# Altium PCB 4ch GRT reader.PcbDoc
Units mil, origin at the board's own origin, x right, y up, seen from the top; angles counter-clockwise.
Board outline 2650 x 4500 mil, 2 copper layers (Top Layer, Bottom Layer); 72 components, 98 nets, 358 pads, 0 vias.
Unrouted connection lines stored in the file: 233.
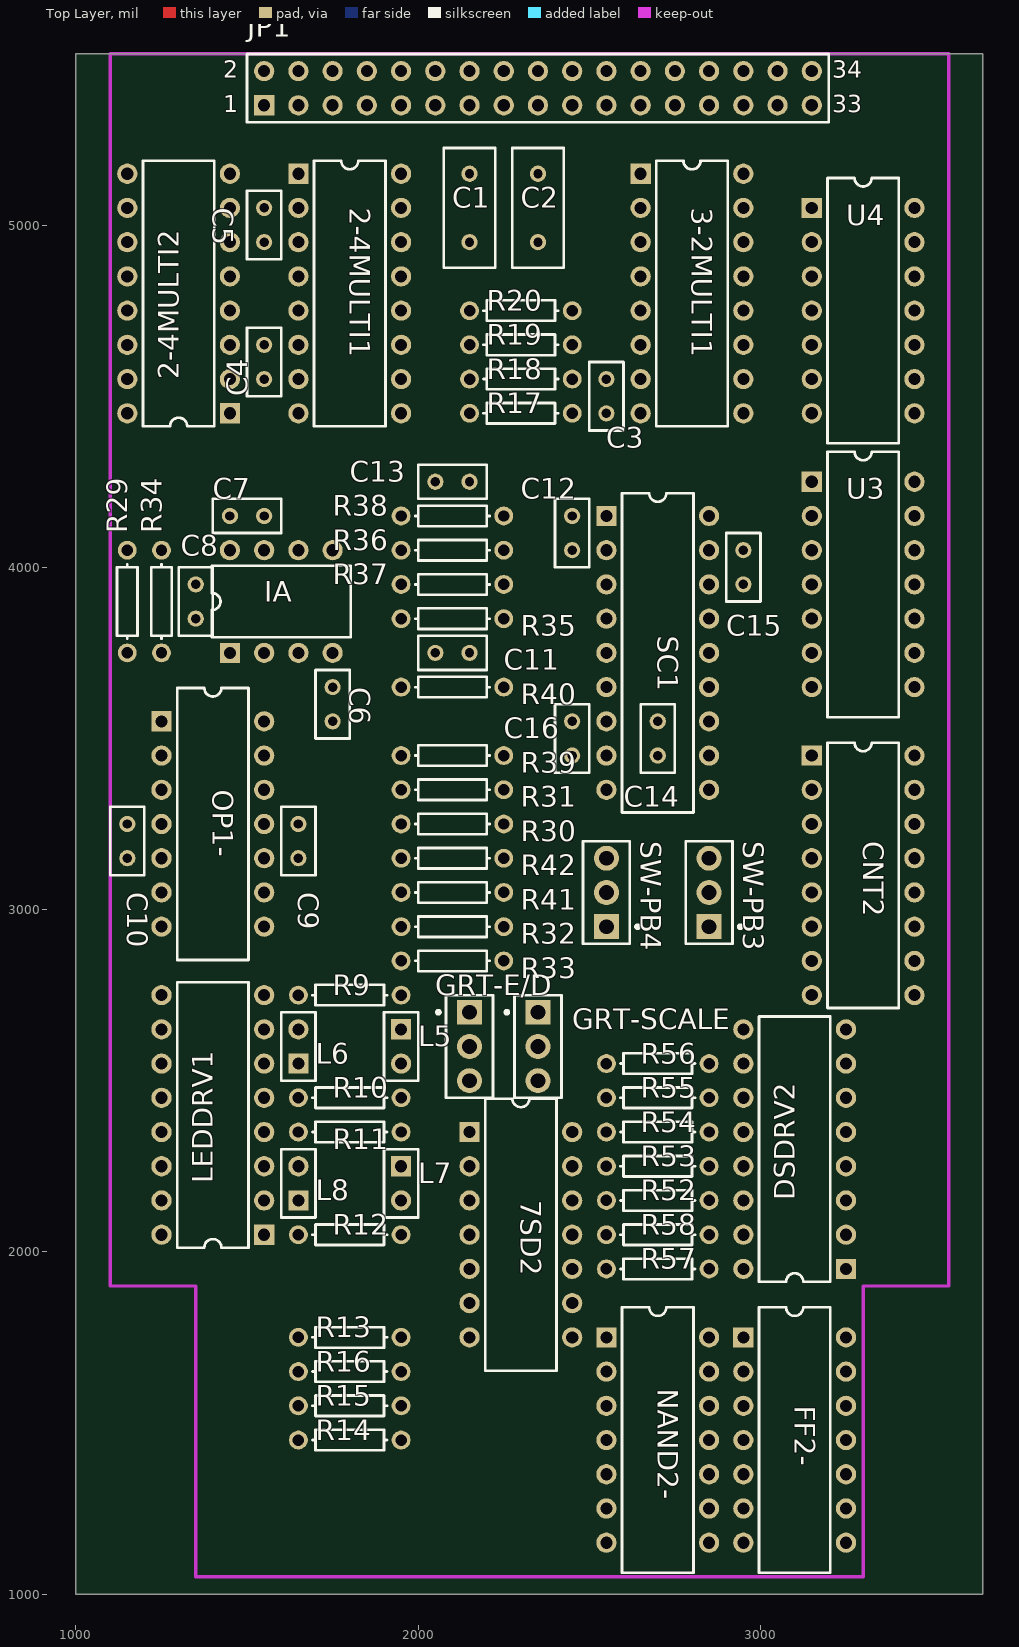
[diagram p0: Top Layer view]
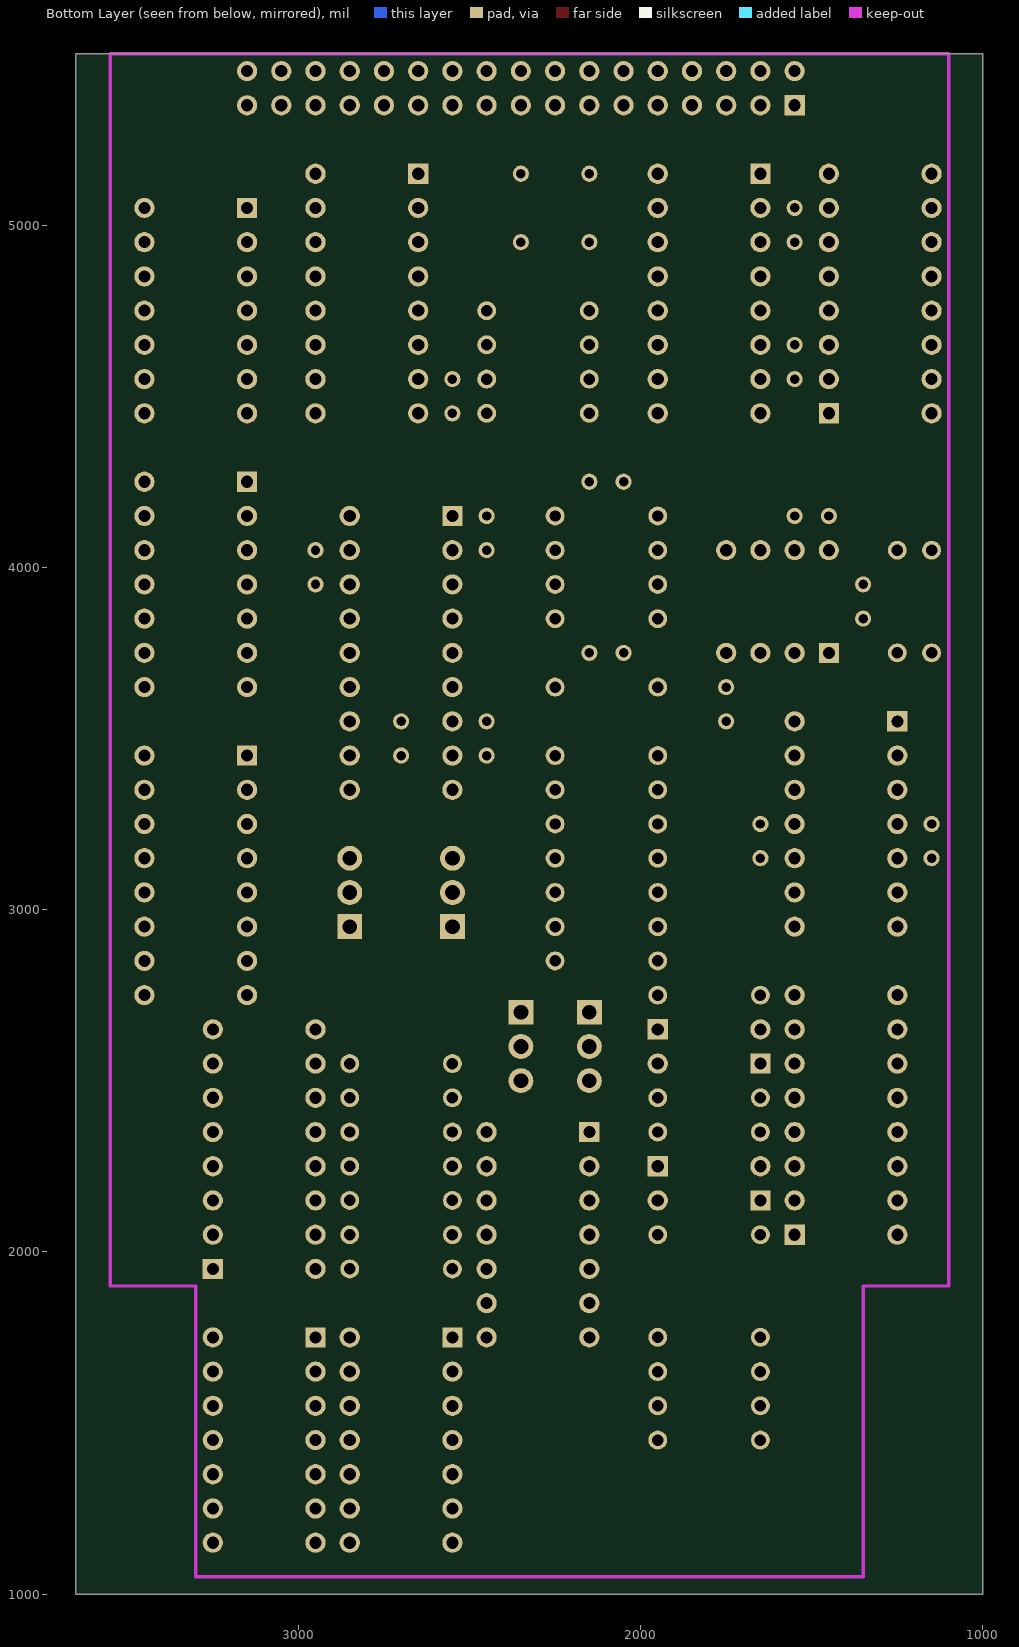
[diagram p1: Bottom Layer view, seen from below]

## Layer stack, top to bottom
Top Layer: signal copper 1.4
Dielectric: dielectric 12.6, FR-4, Dk 4.8
Bottom Layer: signal copper 1.4

## Board outline
1000,1000 1000,5500 3650,5500 3650,1000

## Design rules (kind name [scope] priority, off if disabled: settings)
Clearance [All] p1: gap=10
ComponentClearance [All] p1: gap=10 collisioncheckmode=0
PolygonConnect [All] p1: connectstyle=Relief reliefconductorwidth=10 reliefentries=4 polygonreliefangle="90 Angle"
RoutingLayers [All] p1: top layer=Horizontal bottom layer=Vertical
RoutingVias [All] p1: holewidth=28 width=50 viastyle="Through Hole" minholewidth=28 minwidth=50 maxholewidth=28 maxwidth=50
SolderMaskExpansion [All] p1: expansion=4
TestPointUsage [All] p1: valid=0 allowmultiple=FALSE
Testpoint [All] p1: side=15 testpointundercomponent=TRUE minsize=40 maxsize=100 preferedsize=60 minholesize=0 maxholesize=40 preferedholesize=32 testpointgrid=1 style=1023 order=1234567890
Width [All] p1: maxlimit=10 minlimit=10 preferedwidth=10
16 further rules are at their usual default settings.

## Components (designator, comment, footprint, x,y, rotation, side; value= is the part's Value field where it differs from the comment)
2-4MULTI1 "MC74HC4052N" DIP-16/X1.5 1800,4800 r270 top
2-4MULTI2 "MC74HC4052N" DIP-16/X1.5 1300,4800 r90 top
3-2MULTI1 "MC74HC4053N" DIP-16/X1.5 2800,4800 r270 top
7SD2 "LED-5082-7650" DIP-14 2300,2050 r270 top
C1 "1uF" RAD-0.2 2150,5150 r270 top (schematic designator C36)
C2 "1uF" RAD-0.2 2350,4950 r90 top (schematic designator C37)
C3 ".1uF" RAD-0.1 2550,4550 r270 top (schematic designator C20)
C4 ".1uF" RAD-0.1 1550,4650 r270 top (schematic designator C28)
C5 ".1uF" RAD-0.1 1550,4950 r90 top (schematic designator C31)
C6 ".1uF" RAD-0.1 1750,3650 r270 top (schematic designator C34)
C7 ".1uF" RAD-0.1 1450,4150 r0 top (schematic designator C33)
C8 "33uF" RAD-0.1 1350,3850 r90 top
C9 ".1uF" RAD-0.1 1650,3150 r90 top (schematic designator C26)
C10 ".1uF" RAD-0.1 1150,3250 r270 top (schematic designator C25)
C11 "30uF" RAD-0.1 2050,3750 r0 top (schematic designator C4)
C12 "1uF" RAD-0.1 2450,4150 r270 top (schematic designator C2)
C13 ".47uF" RAD-0.1 2050,4250 r0 top (schematic designator C3)
C14 "in IC socket - GND to pin9" RAD-0.1 2700,3550 r270 top (schematic designator C22)
C15 ".1uF" RAD-0.1 2950,3950 r90 top (schematic designator C1)
C16 ".1uF" RAD-0.1 2450,3450 r90 top (schematic designator C23)
CNT2 "SN74193N" DIP-16/X1.5 3300,3100 r270 top
DSDRV2 "SN7447AN" DIP-16/X1.5 3100,2300 r90 top
FF2- "SN7474N" DIP-14/D19.7 3100,1450 r270 top
GRT-E/D "SW-SPDT" SPDT-3 2150,2600 r0 top
GRT-SCALE "SW-SPDT" SPDT-3 2350,2600 r0 top
IA "INA114AP" DIP-8 1600,3900 r0 top
JP1 "MHDR2X17" HDR2X17 1550,5350 r0 top
L5 "LED2" HDR1X2 1950,2650 r270 top
L6 "LED2" HDR1X2 1650,2550 r90 top
L7 "LED2" HDR1X2 1950,2250 r270 top
L8 "LED2" HDR1X2 1650,2150 r90 top
LEDDRV1 "AM26LS31CN" DIP-16/X1.5 1400,2400 r90 top
NAND2- "SN7400N" DIP-14/D19.7 2700,1450 r270 top
OP1- "OP484EP" DIP-14 1400,3250 r270 top
R9 "100" AXIAL-0.3 1800,2750 r0 top
R10 "100" AXIAL-0.3 1800,2450 r180 top
R11 "100" AXIAL-0.3 1800,2350 r0 top
R12 "100" AXIAL-0.3 1800,2050 r180 top
R13 "10K" AXIAL-0.3 1800,1750 r180 top
R14 "10K" AXIAL-0.3 1800,1450 r0 top
R15 "10K" AXIAL-0.3 1800,1550 r180 top
R16 "10K" AXIAL-0.3 1800,1650 r0 top
R17 "1M" AXIAL-0.3 2300,4450 r180 top
R18 "100K" AXIAL-0.3 2300,4550 r180 top
R19 "1M" AXIAL-0.3 2300,4650 r180 top
R20 "100K" AXIAL-0.3 2300,4750 r180 top
R29 "5K" AXIAL-0.3 1150,3900 r270 top
R30 "1K" AXIAL-0.3 2100,3250 r180 top
R31 "750" AXIAL-0.3 2100,3350 r180 top
R32 "10K" AXIAL-0.3 2100,2950 r180 top
R33 "10K" AXIAL-0.3 2100,2850 r0 top
R34 "100" AXIAL-0.3 1250,3900 r270 top
R35 "47K" AXIAL-0.3 2100,3850 r0 top
R36 "10K" AXIAL-0.3 2100,4050 r180 top
R37 "1K" AXIAL-0.3 2100,3950 r180 top
R38 "4.7K" AXIAL-0.3 2100,4150 r0 top
R39 "10K" AXIAL-0.3 2100,3450 r180 top
R40 "50K" AXIAL-0.3 2100,3650 r180 top
R41 "10K" AXIAL-0.3 2100,3050 r0 top
R42 "10K" AXIAL-0.3 2100,3150 r0 top
R52 "1000" AXIAL-0.3 2700,2150 r180 top
R53 "1000" AXIAL-0.3 2700,2250 r180 top
R54 "1000" AXIAL-0.3 2700,2350 r180 top
R55 "1000" AXIAL-0.3 2700,2450 r180 top
R56 "1000" AXIAL-0.3 2700,2550 r180 top
R57 "1000" AXIAL-0.3 2700,1950 r180 top
R58 "1000" AXIAL-0.3 2700,2050 r180 top
SC1 "NE5521" DIP-18 2700,3750 r270 top
SW-PB3 "SW-SPDT" SPDT-3 2850,3050 r180 top
SW-PB4 "SW-SPDT" SPDT-3 2550,3050 r180 top
U3 "SN74LS125AN" DIP-14/D19.7 3300,3950 r270 top
U4 "SN74LS126AN" DIP-14/D19.7 3300,4750 r270 top

## Footprints (in the part's own frame and the unit in brackets; to place one, negate y for a bottom-side part, rotate by r counter-clockwise, add the part's x,y. Pads: shape width x height; smd on the part's side, far side on the other; paste and mask are expansions set on the pad)
AXIAL-0.3 [mm]
  round 1.4 hole 0.85: 1(-3.81,0) 2(3.81,0)
  silkscreen extent -2.77,-0.76 2.77,0.76
DIP-8 [mm]
  rect 1.5x1.5 hole 0.9: 1(-3.81,-3.81)
  round 1.5 hole 0.9: 2(-1.27,-3.81) 3(1.27,-3.81) 4(3.81,-3.81) 5(3.81,3.81) 6(1.27,3.81) 7(-1.27,3.81) 8(-3.81,3.81)
  silkscreen extent -5.15,-2.65 5.15,2.65
DIP-14 [mm]
  rect 1.5x1.5 hole 0.9: 1(-7.62,-3.81)
  round 1.5 hole 0.9: 2(-5.08,-3.81) 3(-2.54,-3.81) 4(0,-3.81) 5(2.54,-3.81) 6(5.08,-3.81) 7(7.62,-3.81) 8(7.62,3.81) 9(5.08,3.81) 10(2.54,3.81) 11(0,3.81) 12(-2.54,3.81) 13(-5.08,3.81) 14(-7.62,3.81)
  silkscreen extent -10.1,-2.65 10.1,2.65
DIP-14/D19.7 [mm]
  rect 1.5x1.5 hole 0.9: 1(-7.62,-3.81)
  round 1.5 hole 0.9: 2(-5.08,-3.81) 3(-2.54,-3.81) 4(0,-3.81) 5(2.54,-3.81) 6(5.08,-3.81) 7(7.62,-3.81) 8(7.62,3.81) 9(5.08,3.81) 10(2.54,3.81) 11(0,3.81) 12(-2.54,3.81) 13(-5.08,3.81) 14(-7.62,3.81)
  silkscreen extent -9.85,-2.65 9.85,2.65
DIP-16/X1.5 [mm]
  rect 1.5x1.5 hole 0.9: 1(-8.89,-3.81)
  round 1.5 hole 0.9: 2(-6.35,-3.81) 3(-3.81,-3.81) 4(-1.27,-3.81) 5(1.27,-3.81) 6(3.81,-3.81) 7(6.35,-3.81) 8(8.89,-3.81) 9(8.89,3.81) 10(6.35,3.81) 11(3.81,3.81) 12(1.27,3.81) 13(-1.27,3.81) 14(-3.81,3.81) 15(-6.35,3.81) 16(-8.89,3.81)
  silkscreen extent -9.85,-2.65 9.85,2.65
DIP-18 [mm]
  rect 1.5x1.5 hole 0.9: 1(-10.16,-3.81)
  round 1.5 hole 0.9: 2(-7.62,-3.81) 3(-5.08,-3.81) 4(-2.54,-3.81) 5(0,-3.81) 6(2.54,-3.81) 7(5.08,-3.81) 8(7.62,-3.81) 9(10.16,-3.81) 10(10.16,3.81) 11(7.62,3.81) 12(5.08,3.81) 13(2.54,3.81) 14(0,3.81) 15(-2.54,3.81) 16(-5.08,3.81) 17(-7.62,3.81) 18(-10.16,3.81)
  silkscreen extent -11.85,-2.65 11.85,2.65
HDR1X2 [mm]
  rect 1.5x1.5 hole 0.9: 1(0,0)
  round 1.5 hole 0.9: 2(2.54,0)
  silkscreen extent -1.27,-1.27 3.81,1.27
HDR2X17 [mm]
  rect 1.5x1.5 hole 0.9: 1(0,0)
  round 1.5 hole 0.9: 2(0,2.54) 3(2.54,0) 4(2.54,2.54) 5(5.08,0) 6(5.08,2.54) 7(7.62,0) 8(7.62,2.54) 9(10.16,0) 10(10.16,2.54) 11(12.7,0) 12(12.7,2.54) 13(15.24,0) 14(15.24,2.54) 15(17.78,0) 16(17.78,2.54) 17(20.32,0) 18(20.32,2.54) 19(22.86,0) 20(22.86,2.54) 21(25.4,0) 22(25.4,2.54) 23(27.94,0) 24(27.94,2.54) 25(30.48,0) 26(30.48,2.54) 27(33.02,0) 28(33.02,2.54) 29(35.56,0) 30(35.56,2.54) 31(38.1,0) 32(38.1,2.54) 33(40.64,0) 34(40.64,2.54)
  silkscreen extent -1.27,-1.27 41.91,3.81
RAD-0.1 [mm]
  round 1.2 hole 0.7: 1(0,0) 2(2.54,0)
  silkscreen extent -1.27,-1.27 3.81,1.27
RAD-0.2 [mm]
  round 1.2 hole 0.7: 1(0,0) 2(5.08,0)
  silkscreen extent -1.91,-1.91 6.98,1.91
SPDT-3 [mm]
  rect 1.85x1.85 hole 1.1: 1(0,2.54)
  round 1.85 hole 1.1: 2(0,0) 3(0,-2.54)
  silkscreen extent -2.43,-3.81 1.74,3.81

## Part data
2-4MULTI1 2-4MULTI2: "Dual 4-Channel Analog Multiplexer/Demultiplexer"
3-2MULTI1: "Analog Multiplexer/Demultiplexer"
C1 C2 C3 C4 C5 C6 C7 C8 C9 C10 C11 C12 C13 C14 C15 C16: library part Cap, "Capacitor"
CNT2: "Synchronous 4-Bit Up/Down Counter (Dual Clock with Clear)"
DSDRV2: "BCD-to-Seven-Segment Decoder/Driver"
FF2-: "Dual D-Type Positive-Edge-Triggered Flip-Flop with Preset and Clear"
GRT-E/D GRT-SCALE SW-PB3 SW-PB4: "Single-Pole, Double-Throw Switch"
IA: "Precision Instrumentation Amplifier"
JP1: "Header, 17-Pin, Dual row"
L5 L6 L7 L8: "Typical RED, GREEN, YELLOW, AMBER GaAs LED"
LEDDRV1: "Quadruple Differential Line Driver"
NAND2-: "Quadruple 2-Input Positive-NAND Gate"
OP1-: "Precision Rail-to-Rail Input and Output Operational Amplifier"
R9 R10 R11 R12 R13 R14 R15 R16 R17 R18 R19 R20 R29 R30 R31 R32 R33 R34 R35 R36 R37 R38 R39 R40 R41 R42 R52 R53 R54 R55 R56 R57 R58: library part Res1, "Resistor"
U3 U4: "Quadruple Bus Buffer with 3-State Outputs"

## Nets (pads, with @x,y where several pads share a name; then routed paths per layer and width w, separated by ;. In a path a pad name is that pad's centre, name@x,y a point inside that pad or via, vN(x,y) a via of type N, cw(c..) or ccw(c..) an arc to the next point about the centre after c; other vN are vias at no path point)
+5V: 2-4MULTI1.16 2-4MULTI2.16 3-2MULTI1.16 7SD2.3 7SD2.14 C1.2 C7.2 C10.1 C14.2 CNT2.1 CNT2.15 CNT2.16 DSDRV2.3 DSDRV2.4 DSDRV2.5 DSDRV2.16 FF2-.2 FF2-.4 FF2-.10 FF2-.12 GRT-E/D.2 GRT-SCALE.2 IA.7 JP1.23 LEDDRV1.16 OP1-.4 R13.2 R14.1 R15.2 R16.1 SC1.16 SC1.18 U3.14 U4.14
-5V: 2-4MULTI1.7 2-4MULTI2.7 3-2MULTI1.7 C2.1 C3.1 C4.2 C5.2 C6.1 C9.2 C16.2 IA.4 JP1.24 OP1-.11 R35.2 SC1.7
DIO0: JP1.31 U4.2
DIO1: JP1.32 U4.5
DIO2: JP1.33 U4.9
DIO3: JP1.34 U4.12
GND: 2-4MULTI1.8 2-4MULTI2.8 3-2MULTI1.6 3-2MULTI1.8 3-2MULTI1.9 C1.1 C2.2 C3.2 C4.1 C5.1 C6.2 C7.1 C9.1 C10.2 C12.1 C14.1 C15.1 C16.1 CNT2.8 CNT2.9 CNT2.10 DSDRV2.2 DSDRV2.6 DSDRV2.8 FF2-.7 GRT-E/D.3 GRT-SCALE.3 IA.5 JP1.25 LEDDRV1.8 LEDDRV1.12 NAND2-.7 OP1-.3 OP1-.5 OP1-.10 OP1-.12 R29.2 SC1.12 SW-PB3.1 SW-PB4.1 U3.7 U4.7
"GRT OUT": JP1.19 JP1.20 OP1-.14 R42.1
"L/R LINE": JP1.26 U3.1 U3.4 U3.10 U3.13 U4.1 U4.4 U4.10 U4.13
Net2-4MULTI1_1: 2-4MULTI1.1 JP1.4
Net2-4MULTI1_2: 2-4MULTI1.2 JP1.12
Net2-4MULTI1_3: 2-4MULTI1.3 R19.2 R20.2
Net2-4MULTI1_4: 2-4MULTI1.4 JP1.16
Net2-4MULTI1_5: 2-4MULTI1.5 JP1.8
Net2-4MULTI1_6: 2-4MULTI1.6 2-4MULTI2.6 LEDDRV1.1 U3.8 U4.8
Net2-4MULTI1_9: 2-4MULTI1.9 2-4MULTI2.9 DSDRV2.1 U3.6 U4.6
Net2-4MULTI1_10: 2-4MULTI1.10 2-4MULTI2.10 DSDRV2.7 U3.3 U4.3
Net2-4MULTI1_11: 2-4MULTI1.11 JP1.14
Net2-4MULTI1_12: 2-4MULTI1.12 JP1.2
Net2-4MULTI1_13: 2-4MULTI1.13 R17.2 R18.2
Net2-4MULTI1_14: 2-4MULTI1.14 JP1.6
Net2-4MULTI1_15: 2-4MULTI1.15 JP1.10
Net2-4MULTI2_1: 2-4MULTI2.1 JP1.3
Net2-4MULTI2_2: 2-4MULTI2.2 JP1.11
Net2-4MULTI2_3: 2-4MULTI2.3 IA.2
Net2-4MULTI2_4: 2-4MULTI2.4 JP1.15
Net2-4MULTI2_5: 2-4MULTI2.5 JP1.7
Net2-4MULTI2_11: 2-4MULTI2.11 JP1.13
Net2-4MULTI2_12: 2-4MULTI2.12 JP1.1
Net2-4MULTI2_13: 2-4MULTI2.13 IA.3
Net2-4MULTI2_14: 2-4MULTI2.14 JP1.5
Net2-4MULTI2_15: 2-4MULTI2.15 JP1.9
Net3-2MULTI1_1: 3-2MULTI1.1 R20.1
Net3-2MULTI1_2: 3-2MULTI1.2 R19.1
Net3-2MULTI1_10: 3-2MULTI1.10 3-2MULTI1.11 LEDDRV1.7 U3.11 U4.11
Net3-2MULTI1_12: 3-2MULTI1.12 R17.1
Net3-2MULTI1_13: 3-2MULTI1.13 R18.1
Net3-2MULTI1_14: 3-2MULTI1.14 OP1-.1 R31.2 R32.1
Net3-2MULTI1_15: 3-2MULTI1.15 OP1-.7 R33.2
Net7SD2_1: 7SD2.1 R52.2
Net7SD2_2: 7SD2.2 R57.2
Net7SD2_7: 7SD2.7 R56.2
Net7SD2_8: 7SD2.8 R55.2
Net7SD2_10: 7SD2.10 R54.2
Net7SD2_11: 7SD2.11 R58.2
Net7SD2_13: 7SD2.13 R53.2
NetC5_2: 
NetC7_2: 
NetC8_1: C8.1 R29.1 SC1.4 SC1.6
NetC8_2: C8.2 IA.6
NetC11_1: C11.1 OP1-.9 R39.1 R40.2
NetC11_2: C11.2 OP1-.8 R40.1 R41.2
NetC12_2: C12.2 C13.2 R38.2 SC1.2
NetC13_1: C13.1 R37.2 R38.1
NetC15_2: C15.2 SC1.17
NetCNT2_2: CNT2.2 U3.5
NetCNT2_3: CNT2.3 U3.2
NetCNT2_4: CNT2.4 FF2-.8 FF2-.13
NetCNT2_5: CNT2.5 FF2-.1 FF2-.6
NetCNT2_6: CNT2.6 CNT2.14
NetCNT2_11: CNT2.11 CNT2.13
NetDSDRV2_9: DSDRV2.9 R56.1
NetDSDRV2_10: DSDRV2.10 R55.1
NetDSDRV2_11: DSDRV2.11 R54.1
NetDSDRV2_12: DSDRV2.12 R53.1
NetDSDRV2_13: DSDRV2.13 R52.1
NetDSDRV2_14: DSDRV2.14 R58.1
NetDSDRV2_15: DSDRV2.15 R57.1
NetFF2-_3: FF2-.3 NAND2-.3 NAND2-.4
NetFF2-_11: FF2-.11 NAND2-.8 NAND2-.12
NetGRT-E/D_1: GRT-E/D.1 U3.9
NetGRT-SCALE_1: GRT-SCALE.1 U3.12
NetIA_1: IA.1 R34.2
NetIA_8: IA.8 R34.1
NetL5_1: L5.1 L6.2 R9.2
NetL5_2: L5.2 R10.1
NetL6_1: L6.1 LEDDRV1.6 R10.2
NetL7_1: L7.1 L8.2 R11.2
NetL7_2: L7.2 R12.1
NetL8_1: L8.1 LEDDRV1.2 R12.2
NetLEDDRV1_3: LEDDRV1.3 R11.1
NetLEDDRV1_5: LEDDRV1.5 R9.1
NetNAND2-_1: NAND2-.1 R13.1 SW-PB3.2
NetNAND2-_2: NAND2-.2 NAND2-.6
NetNAND2-_5: NAND2-.5 R14.2 SW-PB3.3
NetNAND2-_9: NAND2-.9 R15.1 SW-PB4.2
NetNAND2-_10: NAND2-.10 NAND2-.11
NetNAND2-_13: NAND2-.13 R16.2 SW-PB4.3
NetOP1-_2: OP1-.2 R30.2 R31.1
NetOP1-_6: OP1-.6 R32.2 R33.1
NetOP1-_13: OP1-.13 R41.1 R42.2
NetR30_1: R30.1 SC1.14 SC1.15
NetR35_1: R35.1 SC1.11
NetR36_1: R36.1 SC1.3
NetR36_2: R36.2 R39.2 SC1.1
NetR37_1: R37.1 SC1.5
VCC: 
VCC: FF2-.14 NAND2-.14
pads on no net: 3-2MULTI1.3 3-2MULTI1.4 3-2MULTI1.5 7SD2.4 7SD2.5 7SD2.6 7SD2.9 7SD2.12 CNT2.7 CNT2.12 FF2-.5 FF2-.9 JP1.17 JP1.18 JP1.21 JP1.22 JP1.27 JP1.28 JP1.29 JP1.30 LEDDRV1.4 LEDDRV1.9 LEDDRV1.10 LEDDRV1.11 LEDDRV1.13 LEDDRV1.14 LEDDRV1.15 SC1.8 SC1.9 SC1.10 SC1.13

## Keep-outs
Keep-Out Layer:
  lines w10: 1100,1900 1350,1900 1350,1050 3300,1050 3300,1900 3550,1900 3550,5500 1100,5500 1100,1900

## Text inside footprints (layer, text, board x,y; h text height)
JP1: Top Overlay "2" at 1430,5430 h50; Top Overlay "1" at 1430,5330 h50; Top Overlay "33" at 3210,5330 h50; Top Overlay "34" at 3210,5430 h50